# Altium PCB 5111HB015.pcbdoc (part 1 of 2)
Units mm, origin at the board's own origin, x right, y up, seen from the top; angles counter-clockwise.
Board outline 127.27 x 126.7 mm, 2 copper layers (Top Layer, Top, Bottom Layer, Bottom); 107 components, 65 nets, 610 pads, 396 vias.
Unrouted connection lines stored in the file: 97.
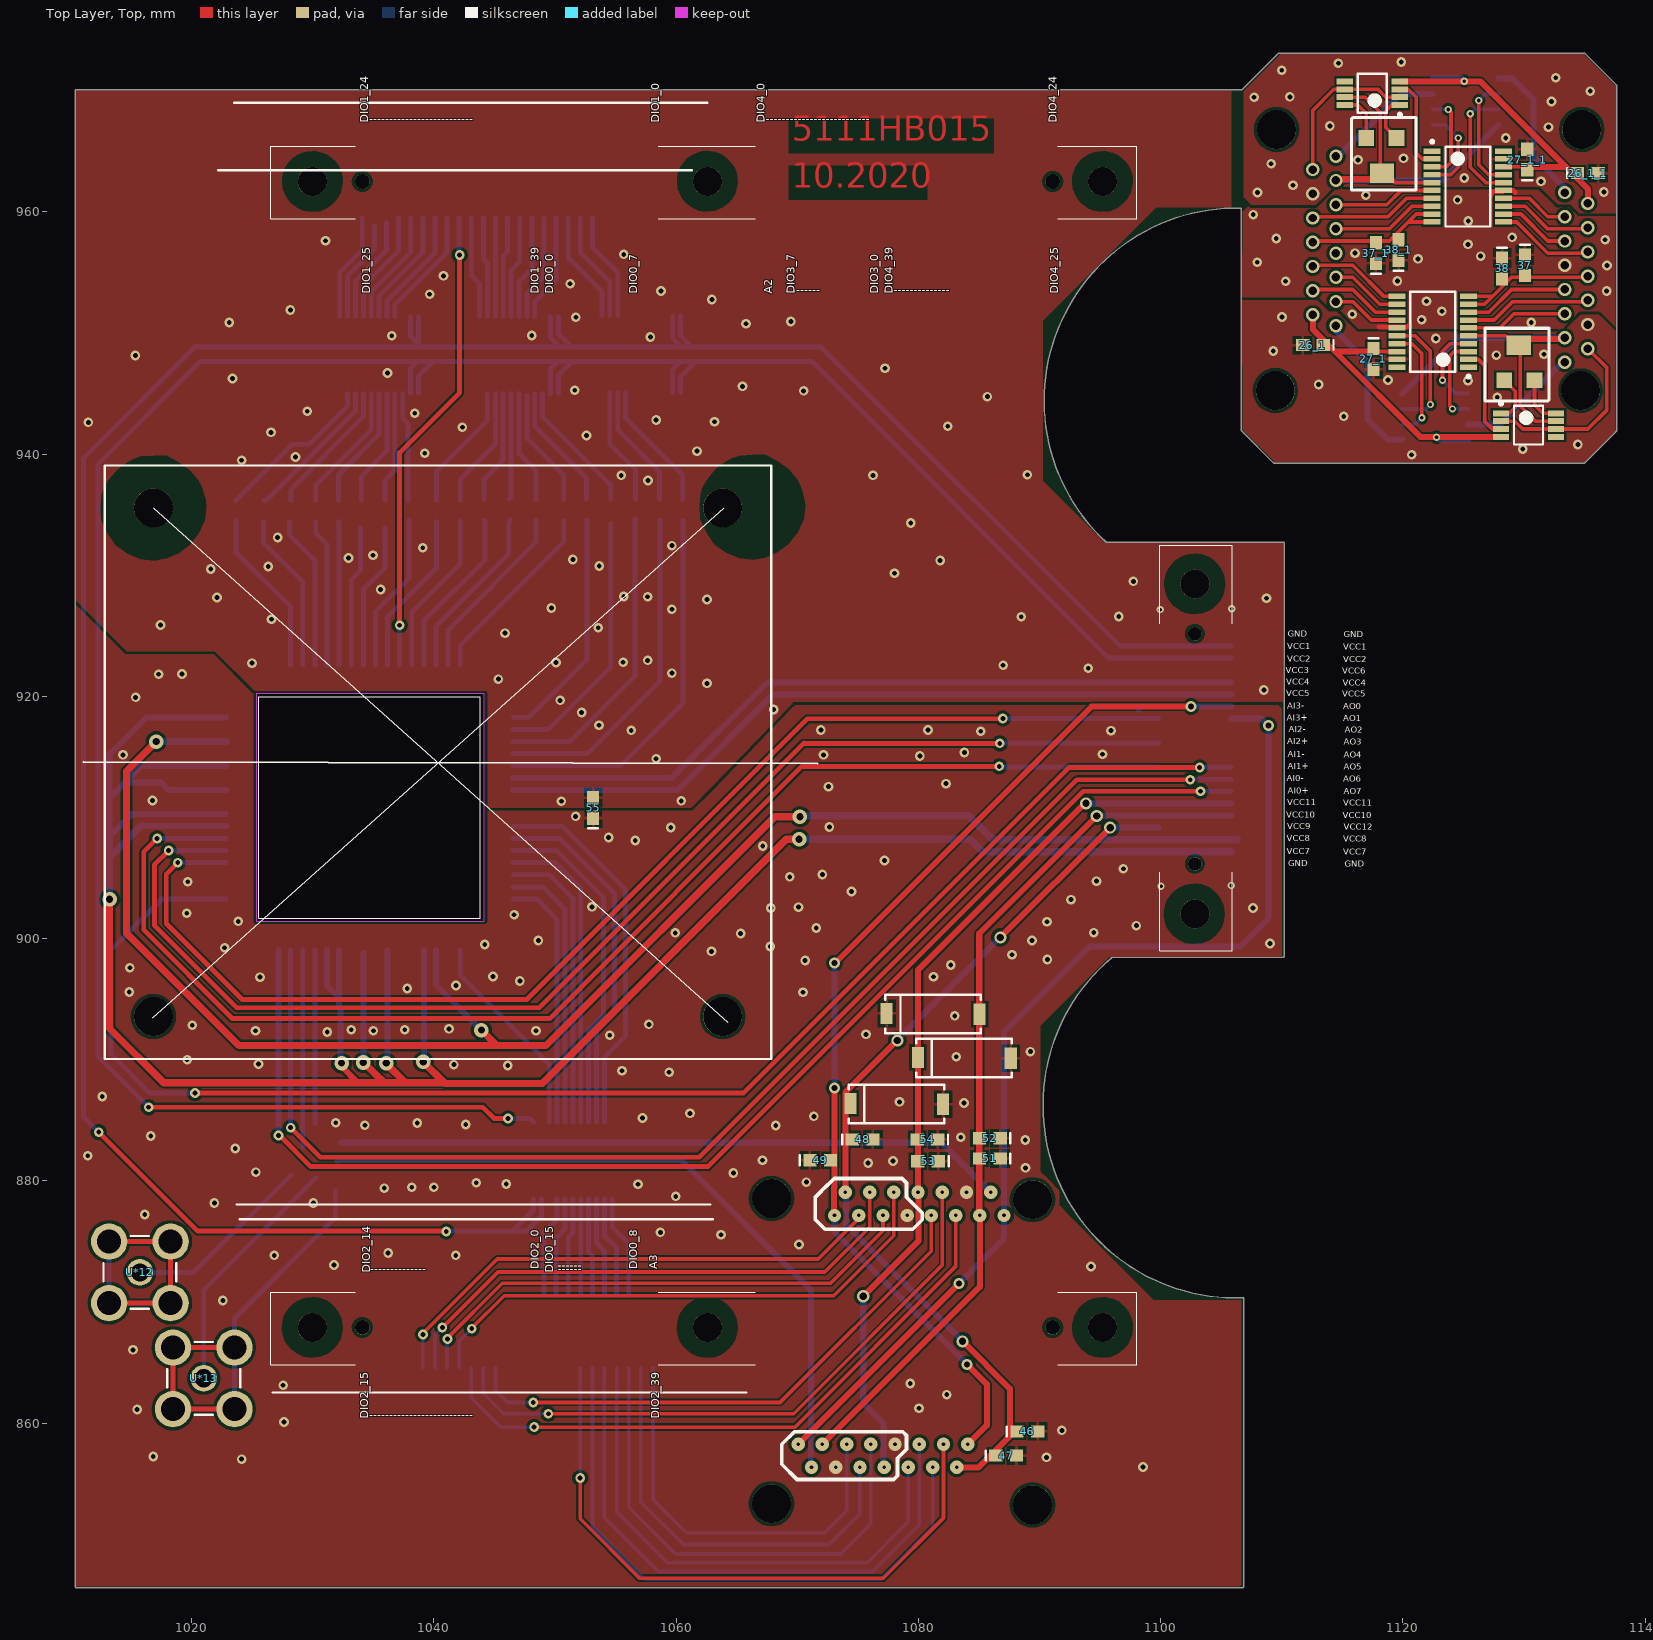
[diagram p0: Top Layer, Top view]
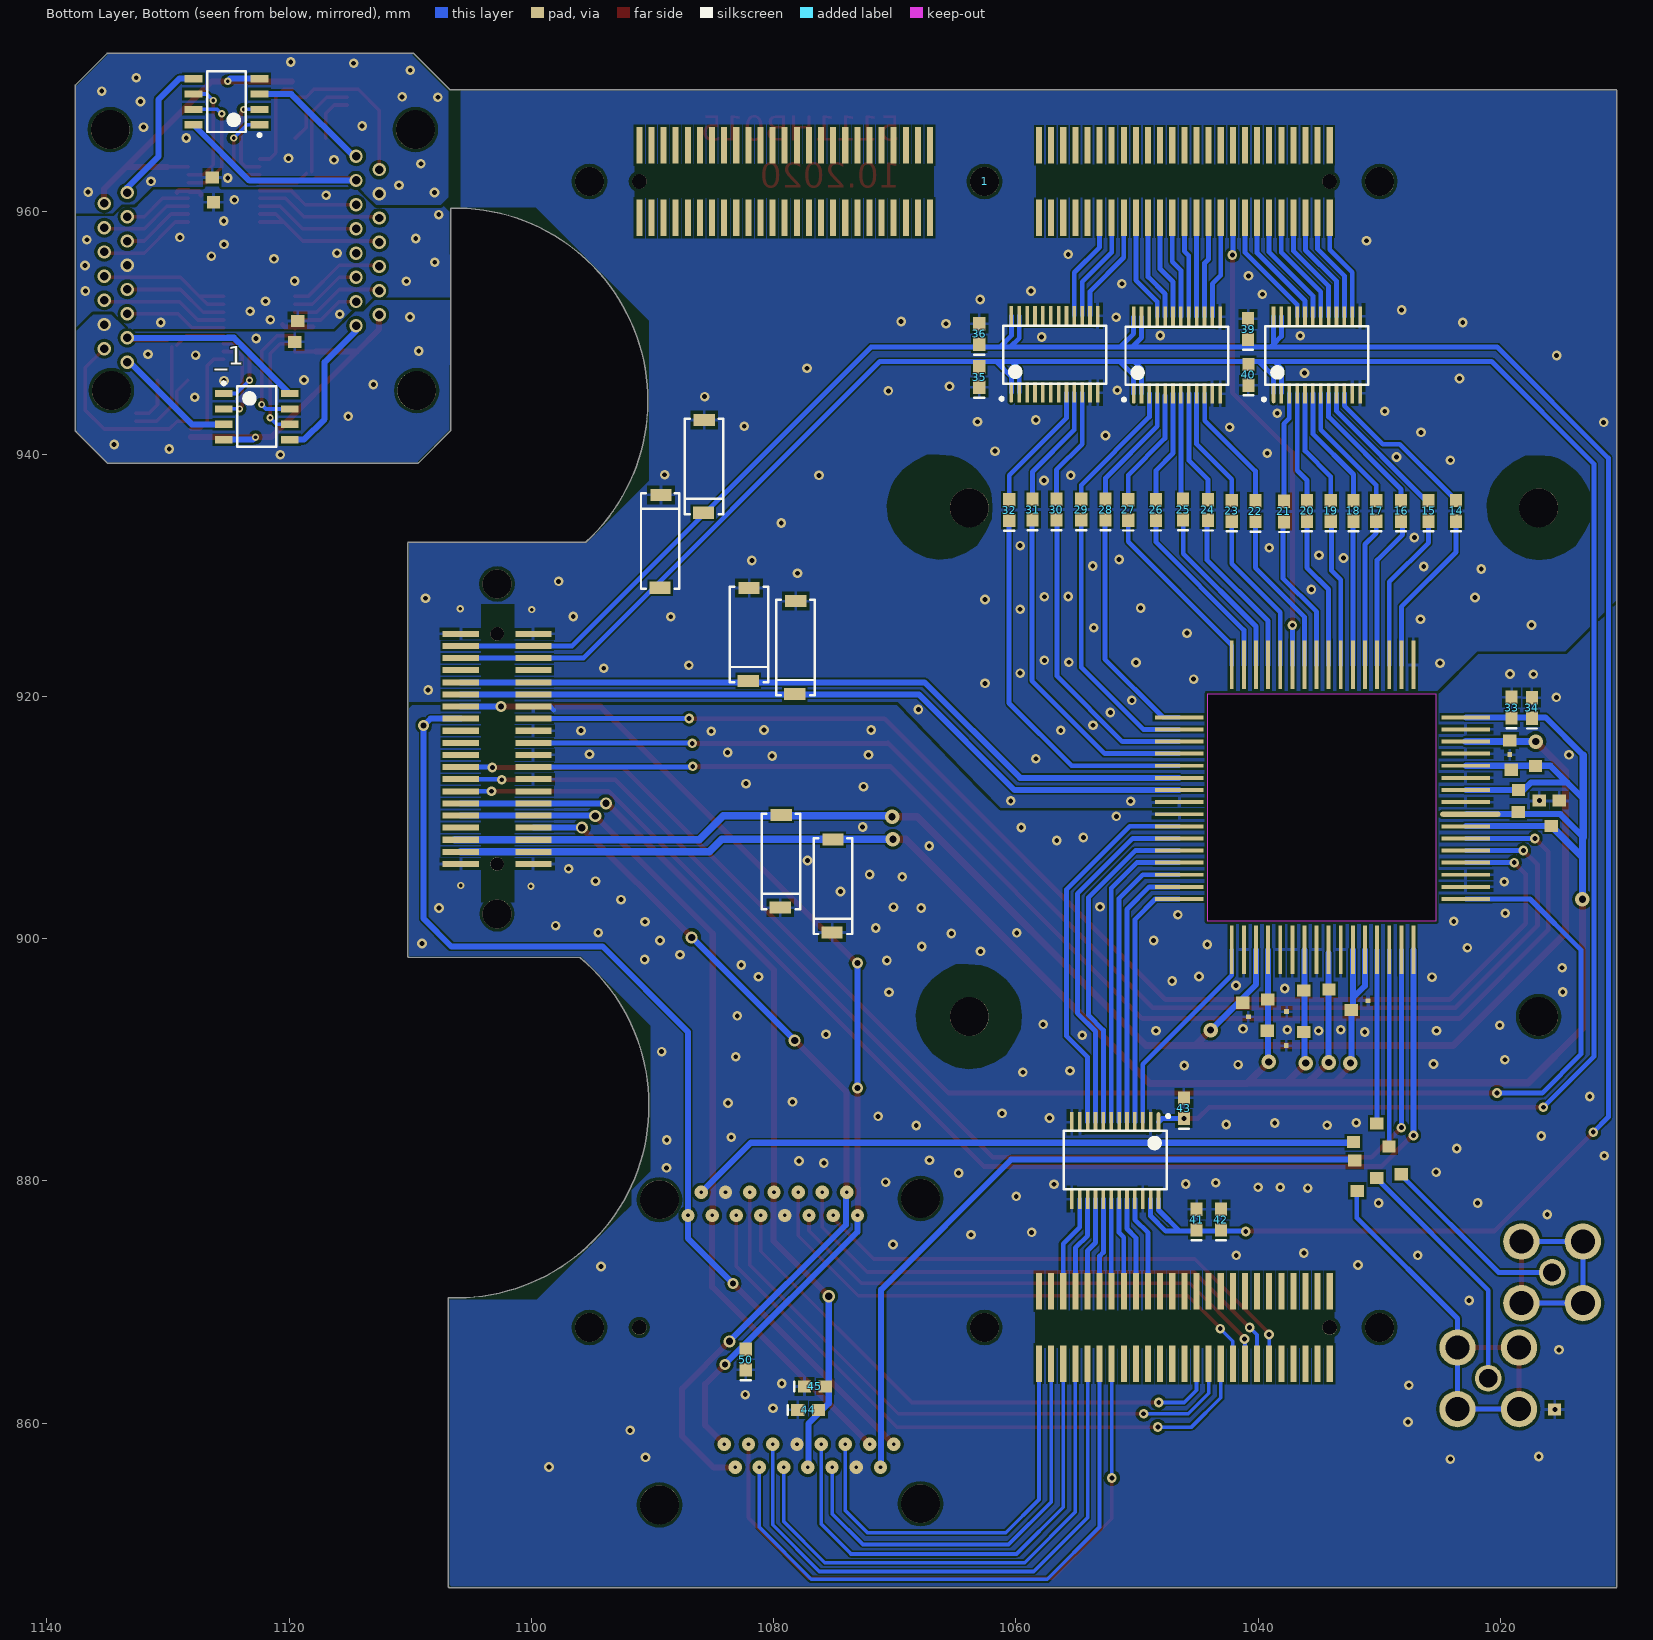
[diagram p1: Bottom Layer, Bottom view, seen from below]

## Layer stack, top to bottom
Top Solder, Top Mask: solder mask 0.0102, Solder Resist, Dk 3.5
Top Layer, Top: signal copper 0.0356
Dielectric 1: dielectric 0.32, FR-4, Dk 4.8
Bottom Layer, Bottom: signal copper 0.0356
Bottom Solder, Bot Mask: solder mask 0.0102, Solder Resist, Dk 3.5

## Board outline
1010.394,846.496 ccw(c1010.494,846.496) 1010.494,846.396 1106.763,846.415 ccw(c1106.763,846.515) 1106.863,846.515 ccw(c1106.763,846.515) 1106.863,846.515 1106.874,870.231 ccw(c1106.777,870.254) 1106.877,870.254 ccw(c1106.777,870.254) 1106.773,870.355 cw(c1106.19,886.244) 1095.97,898.424 ccw(c1095.906,898.5) 1095.986,898.441 1110.1,898.449 ccw(c1110.1,898.549) 1110.2,898.549 1110.2,932.642 ccw(c1110.1,932.642) 1110.1,932.743 1095.574,932.741 ccw(c1095.574,932.641) 1095.518,932.724 cw(c1106.289,944.419) 1106.675,960.314 1106.675,942.025 ccw(c1106.775,942.025) 1106.678,942 ccw(c1106.775,941.975) 1106.704,941.904 1109.329,939.279 ccw(c1109.4,939.35) 1109.4,939.25 1134.95,939.25 ccw(c1134.95,939.35) 1135.021,939.279 1137.58,941.838 ccw(c1137.509,941.909) 1137.6,941.867 ccw(c1137.559,941.959) 1137.659,941.959 1137.659,970.416 ccw(c1137.559,970.416) 1137.63,970.487 1135.046,973.071 ccw(c1134.975,973) 1134.975,973.1 1109.775,973.1 ccw(c1109.775,973) 1109.696,973.062 ccw(c1109.759,972.984) 1109.688,973.055 1106.733,970.1 1010.503,970.1 ccw(c1010.503,970) 1010.497,970.1 1010.498,970.1 ccw(c1010.492,970) 1010.392,970
cut-out: 1025.325,920.225 1025.325,901.45 1044.175,901.45 1044.175,920.225

## Design rules (kind name [scope] priority, off if disabled: settings)
Clearance [All] p1: gap=0.254 except(0.13: Arc-Arc Arc-Track Track-Track; 0.15: Arc-SMDPad Arc-THPad Arc-Via Arc-Fill Arc-Poly Arc-Region Track-SMDPad Track-THPad Track-Via Track-Fill Track-Poly Track-Region SMDPad-SMDPad THPad-THPad THPad-Via; 0.2: SMDPad-Fill SMDPad-Poly SMDPad-Region Via-Via)
PlaneClearance [All] p1: clearance=0.254
PolygonConnect PolygonConnect_4 [All vs IsVia] p1: connectstyle=Direct reliefconductorwidth=0.381 reliefentries=4 polygonreliefangle="90 Angle" airgapwidth=0.254
PolygonConnect PolygonConnect_3 [IsPolygon And InNet('GND') And OnLayer('Bottom Layer, Bottom') vs IsPad] p2: connectstyle=Relief reliefconductorwidth=0.3 reliefentries=4 polygonreliefangle="90 Angle" airgapwidth=0.254
PolygonConnect PolygonConnect_2 [IsPolygon And InNet('GND') And OnLayer('Top Layer, Top') vs IsVia] p3: connectstyle=Relief reliefconductorwidth=0.381 reliefentries=4 polygonreliefangle="90 Angle" airgapwidth=0.254
PolygonConnect PolygonConnect_1 [IsPolygon And InNet('GND') And OnLayer('Top Layer, Top') vs IsPad] p4: connectstyle=Relief reliefconductorwidth=0.3 reliefentries=4 polygonreliefangle="90 Angle" airgapwidth=0.254
PolygonConnect [All] p5: connectstyle=Relief reliefconductorwidth=0.254 reliefentries=4 polygonreliefangle="90 Angle" airgapwidth=0.254
RoutingVias [All] p1: holewidth=0.3 width=0.6 viastyle="Through Hole" minholewidth=0.3 minwidth=0.6 maxholewidth=0.9 maxwidth=1.5
SolderMaskExpansion [All] p1: expansion=0.102
Width [All] p1: maxlimit=0.6 minlimit=0.3 preferedwidth=0.4
29 further rules are at their usual default settings.

## Components (designator, comment, footprint, x,y, rotation, side; value= is the part's Value field where it differs from the comment)
1 "" FSI-150-AD-V1_OTV 1034.027,965.435 r0 top
14 "" CC1608-0603 1023.65,935.325 r90 bottom
15 "" CC1608-0603 1025.925,935.325 r90 bottom
16 "" CC1608-0603 1028.2,935.325 r90 bottom
17 "" CC1608-0603 1030.25,935.325 r90 bottom
18 "" CC1608-0603 1032.125,935.325 r90 bottom
19 "" CC1608-0603 1034,935.325 r90 bottom
20 "" CC1608-0603 1035.95,935.325 r90 bottom
21 "" CC1608-0603 1037.875,935.275 r90 bottom
22 "" CC1608-0603 1040.225,935.3 r90 bottom
23 "" CC1608-0603 1042.175,935.325 r90 bottom
24 "" CC1608-0603 1044.15,935.4 r90 bottom
25 "" CC1608-0603 1046.2,935.425 r90 bottom
26 "" CC1608-0603 1048.425,935.4 r90 bottom
26_1 "" CC1608-0603 1112.575,949 r180 top
26_1_1 "" CC1608-0603 1135.275,963.2 r0 top
27 "" CC1608-0603 1050.725,935.4 r90 bottom
27_1 "" CC1608-0603 1117.575,947.875 r270 top
27_1_1 "" CC1608-0603 1130.275,964.325 r90 top
28 "" CC1608-0603 1052.6,935.425 r90 bottom
29 "" CC1608-0603 1054.6,935.425 r90 bottom
30 "" CC1608-0603 1056.65,935.425 r90 bottom
31 "" CC1608-0603 1058.625,935.425 r90 bottom
32 "" CC1608-0603 1060.55,935.375 r90 bottom
33 "" CC1608-0603 1019.075,919.075 r90 bottom
34 "" CC1608-0603 1017.4,919.05 r90 bottom
35 "" CC1608-0603 1063.025,946.369 r90 bottom
36 "" CC1608-0603 1063.025,949.925 r90 bottom
37 "" CC1608-0603 1130.075,955.6 r270 top
37_1 "" CC1608-0603 1117.775,956.6 r90 top
38 "" CC1608-0603 1128.202,955.34 r270 top
38_1 "" CC1608-0603 1119.648,956.86 r90 top
39 "" CC1608-0603 1040.825,950.325 r90 bottom
40 "" CC1608-0603 1040.8,946.55 r90 bottom
41 "" CC1608-0603 1045.075,876.8 r90 bottom
42 "" CC1608-0603 1043.075,876.8 r90 bottom
43 "" CC1608-0603 1046.125,886 r90 bottom
44 "" CC1608-0603 1077.15,861.1 r180 bottom
45 "" CC1608-0603 1076.6,863.025 r180 bottom
46 "" CC1608-0603 1089,859.325 r0 top
47 "" CC1608-0603 1087.25,857.325 r0 top
48 "" CC1608-0603 1075.4,883.425 r0 top
49 "" CC1608-0603 1071.9,881.7 r0 top
50 "" CC1608-0603 1082.3,865.25 r90 bottom
51 "" CC1608-0603 1085.9,881.85 r180 top
52 "" CC1608-0603 1085.9,883.525 r180 top
53 "" CC1608-0603 1080.8,881.625 r180 top
54 "" CC1608-0603 1080.75,883.425 r180 top
55 "" CC1608-0603 1053.15,910.8 r90 top
_1 "Comment" AD8676ARZ 1122.675,943.1 r180 bottom
U*12 "" 919-109J 1015.725,872.45 r0 top
U*13 "" 919-109J 1021,863.7 r0 top
? "Comment" pad 1125.75,962.25 r90 bottom
? "Comment" pad 1125.65,960.2 r90 bottom
? "Comment" pad 1118.95,948.675 r90 bottom
? "Comment" pad 1118.7,950.4 r90 bottom
? "Comment" PAD_mini 1037.875,891.375 r180 bottom
? "Comment" PAD_mini 1041,893.747 r180 bottom
? "Comment" pad 1035.625,891.7 r90 bottom
? "Comment" pad 1038.65,891.8 r90 bottom
? "Comment" CAP_TANTAL 1080.15,886.425 r270 top
? "Comment" CAP_TANTAL 1083.15,893.854 r270 top
? "Comment" CAP_TANTAL 1085.725,890.225 r270 top
? "Comment" CAP_TANTAL 1079.475,908.325 r180 bottom
? "Comment" CAP_TANTAL 1075.2,906.275 r180 bottom
? "Comment" CAP_TANTAL 1078.275,925.975 r180 bottom
? "Comment" CAP_TANTAL 1082.125,927.05 r180 bottom
? "Comment" CAP_TANTAL 1085.823,940.925 r180 bottom
? "Comment" CAP_TANTAL 1089.275,930.875 r0 bottom
? "" FSI-120-AD-V2_OTV 1100.371,906.327 r90 top
? "Comment" 7841R_pad 1029.967,867.898 r0 top
? "Comment" pad 1040.673,894.104 r90 bottom
? "Comment" PAD_mini 1019.425,915.4 r180 bottom
? "Comment" pad 1018.625,915.757 r90 bottom
? "Comment" pad 1016.5,913.65 r90 bottom
? "Comment" pad 1018.5,913.343 r90 bottom
? "Comment" PAD_mini 1037.85,894.175 r180 bottom
? "Comment" PAD_mini 1031.125,895.075 r180 bottom
? "Comment" pad 1031.7,893.5 r90 bottom
? "Comment" pad 1038.6,894.375 r90 bottom
? "Comment" pad 1035.625,895.125 r90 bottom
? "Comment" pad 1033.55,895.2 r90 bottom
? "Comment" pad 1015.2,908.7 r90 bottom
? "Comment" pad 1014.55,910.8 r90 bottom
? "Comment" pad 1017.925,909.85 r90 bottom
? "Comment" pad 1016.175,910.8 r90 bottom
? "Comment" pad 1017.9,911.675 r90 bottom
? "Comment" SN74LVC4245A_SSOP_24 1051.8,881.725 r270 bottom
? "Comment" SN74LVC4245A_SSOP_24 1056.8,948.2 r90 bottom
? "Comment" SN74LVC4245A_SSOP_24 1035.15,948.15 r90 bottom
? "Comment" 5029HB015 1026.375,910.775 r0 top
? "Comment" SN74LVC4245A_SSOP_24 1046.7,948.125 r90 bottom
? "Comment" "3224W-1-104E, 100 кОм" 1130.675,949.9 r270 top
? "Comment" AD8675ARMZ 1130.375,942.4 r0 top
? "Comment" AD5781 1122.475,950.1 r180 top
? "Comment" AD8676ARZ 1125.175,969.1 r0 bottom
? "Comment" AD5781 1125.375,962.1 r0 top
? "Comment" AD8675ARMZ 1117.475,969.8 r180 top
? "Comment" "3224W-1-104E, 100 кОм" 1117.175,962.3 r90 top
? "Comment" pad 1031.525,882.6 r90 bottom
? "Comment" pad 1031.425,881.075 r90 bottom
? "Comment" pad 1028.6,882.225 r90 bottom
? "Comment" pad 1029.6,884.15 r90 bottom
? "Comment" pad 1027.575,879.95 r90 bottom
? "Comment" pad 1029.6,879.625 r90 bottom
? "Comment" pad 1031.225,878.575 r90 bottom
? "Comment" pad 1014.925,860.525 r90 bottom

## Footprints (in the part's own frame and the unit in brackets; to place one, negate y for a bottom-side part, rotate by r counter-clockwise, add the part's x,y. Pads: shape width x height; smd on the part's side, far side on the other; paste and mask are expansions set on the pad)
919-109J [mm]
  round 2.2 hole 1.5: 1(0,0)
  round 3 hole 2: 2(-2.54,-2.54) 3(2.54,-2.54) 4(2.54,2.54) 5(-2.54,2.54)
  silkscreen extent -3,-3 3,3
"3224W-1-104E, 100 кОм" [mm] "подстроечный резистор"
  rect 1.6x2 smd: 1(0.9,-1.1)
  rect 1.3x1.3 smd: 2(3.8,0.2) 3(3.8,-2.3)
  silkscreen extent -0.5,-3.9 5.5,1.4
5029HB015 [mm] "H18.64-2B"
  oval 5x0.42 smd far side: 1(-3.9,-0.5)
  rect 4x0.32 smd far side: 2(-3.525,-1.5) 3(-3.525,-2.5) 4(-3.525,-3.5) 5(-3.525,-4.5) 6(-3.525,-5.5) 7(-3.525,-6.5) 8(-3.525,-7.5) 25(20.15,-7.5) 26(20.15,-6.5) 27(20.15,-5.5) 28(20.15,-4.5) 29(20.15,-3.5) 30(20.15,-2.5) 31(20.15,-1.5) 32(20.15,-0.5) 33(20.15,0.5) 34(20.15,1.5) 35(20.15,2.5) 36(20.15,3.5) 37(20.15,4.5) 38(20.15,5.5) 39(20.15,6.5) 40(20.15,7.5) 57(-3.525,7.5) 58(-3.525,6.5) 59(-3.525,5.5) 60(-3.525,4.5) 61(-3.525,3.5) 62(-3.525,2.5) 63(-3.525,1.5) 64(-3.525,0.5)
  rect 0.32x4 smd far side: 9(0.8,-11.7) 10(1.8,-11.7) 11(2.8,-11.7) 12(3.8,-11.7) 13(4.8,-11.7) 14(5.8,-11.7) 15(6.8,-11.7) 16(7.8,-11.7) 17(8.8,-11.7) 18(9.8,-11.7) 19(10.8,-11.7) 20(11.8,-11.7) 21(12.8,-11.7) 22(13.8,-11.7) 23(14.8,-11.7) 24(15.8,-11.7) 41(15.8,11.825) 42(14.8,11.825) 43(13.8,11.825) 44(12.8,11.825) 45(11.8,11.825) 46(10.8,11.825) 47(9.8,11.825) 48(8.8,11.825) 49(7.8,11.825) 50(6.8,11.825) 51(5.8,11.825) 52(4.8,11.825) 53(3.8,11.825) 54(2.8,11.825) 55(1.8,11.825) 56(0.8,11.825)
  silkscreen extent -0.85,-9.1 17.45,9.2
7841R_pad [mm]
  rect 0.5x3 smd far side: 1(4.12,3) 2(5.12,3) 3(6.12,3) 4(7.12,3) 5(8.12,3) 6(9.12,3) 7(10.12,3) 8(11.12,3) 9(12.12,3) 10(13.12,3) 11(14.12,3) 12(15.12,3) 13(16.12,3) 14(17.12,3) 15(18.12,3) 16(19.12,3) 17(20.12,3) 18(21.12,3) 19(22.12,3) 20(23.12,3) 21(24.12,3) 22(25.12,3) 23(26.12,3) 24(27.12,3) 25(28.12,3) 76(28.12,-3) 77(27.12,-3) 78(26.12,-3) 79(25.12,-3) 80(24.12,-3) 81(23.12,-3) 82(22.12,-3) 83(21.12,-3) 84(20.12,-3) 85(19.12,-3) 86(18.12,-3) 87(17.12,-3) 88(16.12,-3) 89(15.12,-3) 90(14.12,-3) 91(13.12,-3) 92(12.12,-3) 93(11.12,-3) 94(10.12,-3) 95(9.12,-3) 96(8.12,-3) 97(7.12,-3) 98(6.12,-3) 99(5.12,-3) 100(4.12,-3)
  round 2.4 hole 2.4 unplated: 101(0,0) 102(32.62,0) 103(65.24,0)
  round 1.2 hole 1.2 unplated: 104(4.12,0) 105(61.12,0)
  Top Layer, Top pour cut-out: 30.853,-1.818 31.315,-2.151 31.473,-2.242 31.907,-2.428 32.466,-2.516 33.246,-2.446 33.881,-2.168 34.378,-1.769 34.67,-1.426 34.902,-1.027 35.046,-0.553 35.111,-0.085 35.092,0.352 34.99,0.783 34.809,1.201 34.517,1.628 34.164,1.957 33.97,2.101 33.756,2.231 33.436,2.356 33.209,2.426 32.907,2.491 32.578,2.504 32.132,2.463 31.77,2.365 31.399,2.198 30.977,1.924 30.657,1.581 30.383,1.164 30.262,0.88 30.169,0.574 30.109,0.226 30.104,-0.089 30.165,-0.618 30.35,-1.119 30.592,-1.495
  Top Layer, Top pour cut-out: -1.761,-1.807 -1.299,-2.14 -1.141,-2.231 -0.707,-2.417 -0.148,-2.505 0.632,-2.435 1.267,-2.157 1.764,-1.758 2.056,-1.415 2.288,-1.016 2.432,-0.542 2.497,-0.074 2.478,0.363 2.376,0.794 2.195,1.212 1.903,1.639 1.55,1.968 1.356,2.112 1.142,2.242 0.822,2.367 0.595,2.437 0.293,2.502 -0.036,2.515 -0.482,2.474 -0.844,2.376 -1.215,2.209 -1.637,1.935 -1.957,1.592 -2.231,1.175 -2.352,0.891 -2.445,0.585 -2.505,0.237 -2.51,-0.078 -2.449,-0.607 -2.264,-1.108 -2.022,-1.484
  Top Layer, Top pour cut-out: 63.486,-1.811 63.948,-2.144 64.106,-2.235 64.54,-2.421 65.099,-2.509 65.879,-2.439 66.514,-2.161 67.011,-1.762 67.303,-1.419 67.535,-1.02 67.679,-0.546 67.744,-0.078 67.725,0.359 67.623,0.79 67.442,1.208 67.15,1.635 66.797,1.964 66.603,2.108 66.389,2.238 66.069,2.363 65.842,2.433 65.54,2.498 65.211,2.511 64.765,2.47 64.403,2.372 64.032,2.205 63.61,1.931 63.29,1.588 63.016,1.171 62.895,0.887 62.802,0.581 62.742,0.233 62.737,-0.082 62.798,-0.611 62.983,-1.112 63.225,-1.488
  Bottom Layer, Bottom pour cut-out: 3.742,-1.368 28.435,-1.377 28.435,1.426 3.746,1.426
  silkscreen extent -3.44,-5.37 68.06,2.92
AD5781 [mm] "tssop,20"
  rect 1.4x0.45 smd: 1(-2.95,2.925) 2(-2.95,2.275) 3(-2.95,1.625) 4(-2.95,0.975) 5(-2.95,0.325) 6(-2.95,-0.325) 7(-2.95,-0.975) 8(-2.95,-1.625) 9(-2.95,-2.275) 10(-2.95,-2.925) 11(2.95,-2.925) 12(2.95,-2.275) 13(2.95,-1.625) 14(2.95,-0.975) 15(2.95,-0.325) 16(2.95,0.325) 17(2.95,0.975) 18(2.95,1.625) 19(2.95,2.275) 20(2.95,2.925)
  silkscreen extent -3.08,-3.3 1.85,3.82, body extent -2.25,-3.3 2.25,3.3, height 1.2
AD8675ARMZ [mm] "MSOP-8"
  rect 1.35x0.5 smd: 1(-2.275,0.975) 2(-2.275,0.325) 3(-2.275,-0.325) 4(-2.275,-0.975) 5(2.275,-0.975) 6(2.275,-0.325) 7(2.275,0.325) 8(2.275,0.975)
  silkscreen extent -2.4,-1.6 1.2,1.9, body extent -1.6,-1.6 1.6,1.6, height 1.2
AD8676ARZ [mm] "SOIC-8"
  rect 1.45x0.6 smd: 1(-2.725,1.905) 2(-2.725,0.635) 3(-2.725,-0.635) 4(-2.725,-1.905) 5(2.725,-1.905) 6(2.725,-0.635) 7(2.725,0.635) 8(2.725,1.905)
  silkscreen extent -2.85,-2.5 1.6,2.88, body extent -2,-2.5 2,2.5, height 1.75
CAP_TANTAL [mm]
  rect 1.75x1 smd: 1(0.1,1.9) 2(0.025,-5.765)
  silkscreen extent -1.5,-5.89 1.68,2
CC1608-0603 [mm]
  rect 1.1x1 smd: 1(-0.85,0) 2(0.85,0)
  silkscreen extent -1.7,-0.4 -1.7,0.4
FSI-120-AD-V2_OTV [mm]
  rect 0.5x3 smd far side: 1(-0.16,0.54) 2(0.84,0.54) 3(1.84,0.54) 4(2.84,0.54) 5(3.84,0.54) 6(4.84,0.54) 7(5.84,0.54) 8(6.84,0.54) 9(7.84,0.54) 10(8.84,0.54) 11(9.84,0.54) 12(10.84,0.54) 13(11.84,0.54) 14(12.84,0.54) 15(13.84,0.54) 16(14.84,0.54) 17(15.84,0.54) 18(16.84,0.54) 19(17.84,0.54) 20(18.84,0.54) 21(18.84,-5.46) 22(17.84,-5.46) 23(16.84,-5.46) 24(15.84,-5.46) 25(14.84,-5.46) 26(13.84,-5.46) 27(12.84,-5.46) 28(11.84,-5.46) 29(10.84,-5.46) 30(9.84,-5.46) 31(8.84,-5.46) 32(7.84,-5.46) 33(6.84,-5.46) 34(5.84,-5.46) 35(4.84,-5.46) 36(3.84,-5.46) 37(2.84,-5.46) 38(1.84,-5.46) 39(0.84,-5.46) 40(-0.16,-5.46)
  round 1.1 hole 1.1 unplated: 41(-0.16,-2.46) 42(18.84,-2.46)
  round 2.4 hole 2.4 unplated: 43(-4.28,-2.46) 44(22.96,-2.46)
  silkscreen extent -7.34,-5.54 26.16,0.46
FSI-150-AD-V1_OTV [mm]
  rect 0.5x3 smd far side: 1(0.06,0.08) 2(1.06,0.08) 3(2.06,0.08) 4(3.06,0.08) 5(4.06,0.08) 6(5.06,0.08) 7(6.06,0.08) 8(7.06,0.08) 9(8.06,0.08) 10(9.06,0.08) 11(10.06,0.08) 12(11.06,0.08) 13(12.06,0.08) 14(13.06,0.08) 15(14.06,0.08) 16(15.06,0.08) 17(16.06,0.08) 18(17.06,0.08) 19(18.06,0.08) 20(19.06,0.08) 21(20.06,0.08) 22(21.06,0.08) 23(22.06,0.08) 24(23.06,0.08) 25(24.06,0.08) 26(33.06,0.08) 27(34.06,0.08) 28(35.06,0.08) 29(36.06,0.08) 30(37.06,0.08) 31(38.06,0.08) 32(39.06,0.08) 33(40.06,0.08) 34(41.06,0.08) 35(42.06,0.08) 36(43.06,0.08) 37(44.06,0.08) 38(45.06,0.08) 39(46.06,0.08) 40(47.06,0.08) 41(48.06,0.08) 42(49.06,0.08) 43(50.06,0.08) 44(51.06,0.08) 45(52.06,0.08) 46(53.06,0.08) 47(54.06,0.08) 48(55.06,0.08) 49(56.06,0.08) 50(57.06,0.08) 51(57.06,-5.92) 52(56.06,-5.92) 53(55.06,-5.92) 54(54.06,-5.92) 55(53.06,-5.92) 56(52.06,-5.92) 57(51.06,-5.92) 58(50.06,-5.92) 59(49.06,-5.92) 60(48.06,-5.92) 61(47.06,-5.92) 62(46.06,-5.92) 63(45.06,-5.92) 64(44.06,-5.92) 65(43.06,-5.92) 66(42.06,-5.92) 67(41.06,-5.92) 68(40.06,-5.92) 69(39.06,-5.92) 70(38.06,-5.92) 71(37.06,-5.92) 72(36.06,-5.92) 73(35.06,-5.92) 74(34.06,-5.92) 75(33.06,-5.92) 76(24.06,-5.92) 77(23.06,-5.92) 78(22.06,-5.92) 79(21.06,-5.92) 80(20.06,-5.92) 81(19.06,-5.92) 82(18.06,-5.92) 83(17.06,-5.92) 84(16.06,-5.92) 85(15.06,-5.92) 86(14.06,-5.92) 87(13.06,-5.92) 88(12.06,-5.92) 89(11.06,-5.92) 90(10.06,-5.92) 91(9.06,-5.92) 92(8.06,-5.92) 93(7.06,-5.92) 94(6.06,-5.92) 95(5.06,-5.92) 96(4.06,-5.92) 97(3.06,-5.92) 98(2.06,-5.92) 99(1.06,-5.92) 100(0.06,-5.92)
  round 2.4 hole 2.4 unplated: 101(-4.06,-2.92) 102(28.56,-2.92) 103(61.18,-2.92)
  round 1.2 hole 1.2 unplated: 104(0.06,-2.92) 105(57.06,-2.92)
  silkscreen extent -7.5,-6 64,0
pad [mm]
  rect 1x1.1 smd: 1(0.6,0.6)
PAD_mini [mm]
  rect 0.4x0.4 smd: 1(0.2,-0.2)
SN74LVC4245A_SSOP_24 [mm]
  oval 1.65x0.3 smd: 1(-3.125,3.575)
  rect 1.65x0.3 smd: 2(-3.125,2.925) 3(-3.125,2.275) 4(-3.125,1.625) 5(-3.125,0.975) 6(-3.125,0.325) 7(-3.125,-0.325) 8(-3.125,-0.975) 9(-3.125,-1.625) 10(-3.125,-2.275) 11(-3.125,-2.925) 12(-3.125,-3.575) 13(3.225,-3.575) 14(3.225,-2.925) 15(3.225,-2.275) 16(3.225,-1.625) 17(3.225,-0.975) 18(3.225,-0.325) 19(3.225,0.325) 20(3.225,0.975) 21(3.225,1.625) 22(3.225,2.275) 23(3.225,2.925) 24(3.225,3.575)
  silkscreen extent -3.75,-4.25 2.4,4.5, body extent -3.28,-3.95 3.28,3.95, height 1.2

## Free pads (board coordinates)
  round 3.2 hole 3.2 unplated: 0(1016.842,893.566) 0(1016.842,935.566) 0(1063.842,893.566) 0(1063.842,935.566) 0(1067.875,853.35) 0(1067.875,878.55) 0(1089.425,853.25) 0(1089.425,878.45) 0(1109.475,945.25) 0(1109.575,966.8) 0(1134.675,945.25) 0(1134.775,966.8)

## Via types
v1: diameter 0.8, hole 0.4, Top Layer, Top to Bottom Layer, Bottom, tented both sides, 300 vias
v2: diameter 1.1, hole 0.3, Top Layer, Top to Bottom Layer, Bottom, 30 vias
v3: diameter 1.1, hole 0.7, Top Layer, Top to Bottom Layer, Bottom, 30 vias
v4: diameter 0.6, hole 0.3, Top Layer, Top to Bottom Layer, Bottom, tented both sides, 14 vias
v5: diameter 1.2, hole 0.6, Top Layer, Top to Bottom Layer, Bottom, tented both sides, 9 vias
v6: diameter 1, hole 0.6, Top Layer, Top to Bottom Layer, Bottom, tented both sides, 7 vias
v7: diameter 0.9, hole 0.5, Top Layer, Top to Bottom Layer, Bottom, tented both sides, 6 vias

## Nets (pads, with @x,y where several pads share a name; then routed paths per layer and width w, separated by ;. In a path a pad name is that pad's centre, name@x,y a point inside that pad or via, vN(x,y) a via of type N, cw(c..) or ccw(c..) an arc to the next point about the centre after c; other vN are vias at no path point)
AD8675_NULL: ?.1@1119.75,968.825 ?.1@1128.1,943.375 ?.2@1116.975,966.1 ?.2@1130.875,946.1 ?.3@1119.475,966.1 ?.3@1128.375,946.1 ?.8@1115.2,968.825 ?.8@1132.65,943.375 | length 14.8
  Top Layer, Top w0.3: ?.8@1115.2,968.825 1116.275,968.825 1116.975,968.125 ?.2@1116.975,966.1 ; ?.1@1119.075,968.825 1118.575,968.325 1118.575,967 ?.3@1119.475,966.1 ; ?.3@1128.375,946.1 1129.275,945.2 1129.275,943.875 1128.775,943.375 ; ?.2@1130.875,946.1 1130.875,944.075 1131.575,943.375 ?.8@1132.65,943.375
AD8675_VOUT: ?.1@1032.025,881.675 ?.1@1032.125,883.2 ?.2@1119.75,969.475 ?.2@1128.1,942.725 ?.6@1115.2,970.125 ?.6@1132.65,942.075 | length 142
  Top Layer, Top w0.3: v3(1112.575,963.5) 1112.575,968.4 1114.3,970.125 ?.6@1115.2,970.125 1117.95,970.125 1118.6,969.475 ?.2@1119.75,969.475 ; ?.2@1128.1,942.725 1129.25,942.725 1129.9,942.075 ?.6@1132.65,942.075 1135.275,942.075 1136.85,943.65 1136.85,947.125 v3(1135.275,948.7)
  Bottom Layer, Bottom w0.5: ?.1@1032.025,881.675 1032.1,881.75 1060.4,881.75 1071.125,871.025 1071.125,856.4 v2(1071.175,856.35) ; ?.1@1032.35,883.15 1081.875,883.15 v2(1085.975,879.05)
AGND: 33.2 34.2 41.2 42.2 43.2 44.1 45.1 46.2 47.2 48.2 49.1 50.1 51.1 52.1 53.1 54.1 55.1 ?.1@1015.15,911.4 ?.1@1015.525,861.125 ?.1@1016.775,911.4 ?.1@1019.225,915.2 ?.1@1030.925,894.875 ?.1@1037.65,893.975 ?.1@1037.675,891.175 ?.1@1040.8,893.547 ?.1@1082.05,886.325 ?.1@1087.625,890.125 ?.1@1099.831,906.167 ?.2@1048.875,884.85 ?.2@1075.175,900.51 ?.2@1077.385,893.829 ?.2@1079.45,902.56 ?.6@1022.85,905.275 ?.7@1022.85,904.275 ?.8@1099.831,913.167 ?.10@1099.831,915.167 ?.11@1054.725,884.85 ?.12@1055.375,884.85 ?.12@1099.831,917.167 ?.13@1055.375,878.5 ?.14@1099.831,919.167 ?.15@1033.175,899.075 ?.17@1035.175,899.075 ?.19@1037.175,899.075 ?.20@1038.175,899.075 ?.22@1037.425,951.375 ?.22@1048.975,951.35 ?.22@1049.525,878.5 ?.22@1059.075,951.425 ?.23@1041.175,899.075 ?.32@1046.525,910.275 ?.40@1105.831,906.167 ?.58 ?.60 ?.62 ?.64 | length 1.8
  Bottom Layer, Bottom w0.4: 1098.15,918.875 1098.442,919.167 ?.14@1099.831,919.167
  other v1: 1098.55,856.375 1024.125,857.025 1090.575,857.175 1016.825,857.25 1091.85,859.4 1027.625,860.1 1015.5,861.125 1080.05,861.225 1082.35,862.35 1027.55,863.125 1079.325,863.275 1015.15,866.05 1022.575,870.125 1094.25,872.925 1031.75,873.05 1026.825,873.85 1041.8,873.85 1036.225,874.05 1070.15,874.75 1063.7,875.55 1058.7,875.75 1016.125,877.225 1021.875,878.175 1030.05,878.175 1059.975,878.725 1035.9,879.4 1038.175,879.475 1040,879.475 1056.85,879.725 1045.975,879.75 1043.5,879.85 1070.75,879.9 1064.725,880.65 1025.3,880.725 1088.85,881.075 1075.85,881.475 1077.9,881.65 1067.125,881.7 1011.425,882.075 1023.6,882.675 1088.825,883.375 1083.5,883.6 1016.625,883.7 1068.225,884.575 1034.3,884.6 1042.625,884.65 1038.625,884.775 1031.9,884.8 1057.225,885.2 1071.375,885.325 1061.15,885.575 1083.775,886.425 1078.45,886.525 1012.625,886.975 1059.425,888.975 1055.525,889.1 1046.1,889.525 1041.65,889.6 1025.525,889.65 1019.625,890 1083.125,890.25 1089.25,890.675 1054.525,892.025 1075.675,892.1 1031.2,892.3 1025.275,892.4 1035,892.4 1048.425,892.4 1033.175,892.475 1037.6,892.475 1041.252,892.552 1020.05,892.85 1057.75,892.925 1083,893.625 1070.475,895.575 1014.85,895.6 1037.802,895.879 1041.825,896.125 1047.1,896.5 1025.65,896.825 1081.25,896.85 1044.875,896.875 1014.9,897.6 1082.675,897.825 1070.65,898.2 1090.65,898.275 1087.725,898.675 1062.925,898.95 1022.725,899.25 1067.775,899.35 1044.2,899.525 1109.025,899.6 1048.625,899.85 1089.375,899.85 1065.325,900.425 1059.925,900.475 1094.475,900.5 1071.575,900.875 1098,901.075 1090.625,901.4 1023.85,901.425 1046.625,901.975 1019.6,902.1 1067.825,902.525 1107.625,902.525 1070.1,902.6 1053.05,902.625 1092.6,903.225 1074.475,903.9 1019.675,904.7 1094.7,904.75 1069.375,905.1 1072.075,905.3 1096.925,905.775 1077.2,906.45 1067.15,907.65 1056.625,908.1 1054.425,908.35 1059.55,909.175 1072.65,909.225 1051.7,910.1 1016.775,911.4 1072.575,912.55 1082.275,912.8 1080.125,915.075 1014.325,915.175 1072.175,915.175 1095.2,915.225 1083.8,915.375 1085.15,917.125 1095.9,917.175 1071.95,917.225 1080.8,917.225 1015.375,919.925 1017.275,921.825 1019.2,921.85
  other v2: 1073.175,856.35 1078.075,858.25 1079.075,877.15 1083.975,879.05
  other v4: 1100.041,904.329 1105.835,904.391
AVCC_2.5: 33.1 34.1 ?.1@1015.8,909.3 ?.1@1017.1,914.25 ?.1@1018.5,912.275 ?.1@1018.525,910.45 ?.1@1019.1,913.943 ?.1@1022.475,910.275 ?.1@1032.3,894.1 ?.1@1034.15,895.8 ?.1@1036.225,892.3 ?.1@1036.225,895.725 ?.1@1039.2,894.975 ?.1@1039.25,892.4 ?.1@1075.1,908.175 ?.2@1022.85,909.275 ?.2@1099.831,907.167 ?.13@1031.175,899.075 ?.14@1032.175,899.075 ?.16@1034.175,899.075 ?.18@1036.175,899.075 ?.21@1039.175,899.075 ?.39@1105.831,907.167 ?.57 ?.61 ?.63 | length 227.6
  Top Layer, Top w0.5: v5(1032.375,889.725) 1032.375,889.45 1033.725,888.1
  Top Layer, Top w0.6: v5(1013.225,903.25) 1013.225,892.575 1017.7,888.1 1033.725,888.1 1035.923,888.1 ; v5(1034.175,889.775) 1035.923,888.1 ; v5(1036.075,889.725) 1036.075,889.675 1037.65,888.1 ; v5(1039.125,889.825) 1040.85,888.1 1037.65,888.1 ; 1040.9,888.05 1048.939,888.05 1069.089,908.2 v5(1070.15,908.2) ; 1035.923,888.1 1037.65,888.1
  Bottom Layer, Bottom w0.5: 1013.15,908.375 1015.05,910.275 ?.1@1022.475,910.275 ?.1@1022.8,910.275 ; 1013.15,915.15 1016.275,918.275 ?.57@1022.85,918.275 ; 1013.225,911.625 1014.475,912.875 ; ?.1@1015.975,909.3 ?.2@1022.825,909.3 ; ?.63@1022.85,912.275 ?.1@1018.5,912.275 1018.075,912.275 1017.475,912.875 1014.475,912.875 ; ?.61@1022.85,914.275 1015.875,914.275 1014.475,912.875 ; ?.13@1031.175,899.075 1031.175,896.1 1032.175,895.1 ; ?.1@1032.175,894.425 1032.175,895.1 ; ?.14@1032.175,899.075 1032.175,895.1 ; ?.1@1032.3,894.1 1032.3,889.775 1032.35,889.725 v5(1032.375,889.725) ; v5(1034.175,889.775) ?.16@1034.175,898.8 ; v5(1036.075,889.725) 1036.175,889.825 ?.18@1036.175,899.075 ; v5@1039.175,889.9 ?.21@1039.175,899.075
  Bottom Layer, Bottom w0.6: 1013.15,915.15 1013.15,908.375 1013.212,908.313 1013.212,903.262 v5(1013.225,903.25) ; 1013.225,906.725 ?.1@1015.8,909.3 ?.1@1015.975,909.3 ; v5(1070.15,908.2) 1084.275,908.2 1085.308,907.167 ?.2@1099.831,907.167 ?.39@1105.831,907.167
AVDD_1.2: ?.1@1019.225,916.357 ?.1@1041.273,894.704 ?.1@1079.375,910.225 ?.3@1099.831,908.167 ?.22@1040.175,899.075 ?.38@1105.831,908.167 ?.59 | length 136.8
  Top Layer, Top w0.6: v5(1017.075,916.275) 1014.625,913.825 1014.625,900.45 1023.9,891.175 1045.2,891.175 ; v5(1043.925,892.45) 1045.2,891.175 ; v5(1070.225,910.075) 1068.15,910.075 1049.25,891.175 1045.2,891.175
  Bottom Layer, Bottom w0.5: ?.22@1040.175,899.075 1040.175,896.2 v5(1043.925,892.45)
  Bottom Layer, Bottom w0.6: v5(1017.075,916.275) ?.59@1022.85,916.275 ; v5@1070.225,910.15 1084.15,910.15 1086.133,908.167 ?.3@1099.831,908.167 ?.38@1105.831,908.167 ?.38@1106.35,908.167
BUFMODE0: ?.5@1050.825,884.85 ?.18@1051.087,870.898 ?.19@1051.475,878.5 ?.26@1046.525,904.275 | length 30.7
  Bottom Layer, Bottom w0.4: ?.26@1046.525,904.275 1048.975,904.275 1050.825,902.425 ?.5@1050.825,884.85 ; ?.18@1051.087,870.573 ?.18@1051.087,870.898 1051.087,875.337 1051.475,875.725 ?.19@1051.475,878.5
BUFMODE1: ?.4@1050.175,884.85 ?.17@1050.087,870.898 ?.20@1050.825,878.5 ?.25@1046.525,903.275 | length 29.3
  Bottom Layer, Bottom w0.4: ?.25@1046.525,903.275 1048.475,903.275 1050.175,901.575 ?.4@1050.175,884.85 ; ?.17@1050.087,870.573 ?.17@1050.087,870.898 1050.087,875.312 1050.825,876.05 ?.20@1050.825,878.5
CLKM: 1.82 31.1 31.2 ?.9@1055.175,945.075 ?.15@1054.525,951.425 ?.37@1046.525,915.275 | length 47.2
  Bottom Layer, Bottom w0.4: ?.37@1046.525,915.275 1052.65,915.275 1058.675,921.3 31.1@1058.675,934.575 ; 1.82@1052.087,959.515 1052.087,956.663 1054.525,954.225 ?.15@1054.525,951.425 ; ?.9@1055.175,945.075 1055.175,942 1058.625,938.55 31.2@1058.625,936.275
CLKP: 1.81 32.1 32.2 ?.8@1055.825,945.075 ?.16@1055.175,951.425 ?.36@1046.525,914.275 | length 51
  Bottom Layer, Bottom w0.4: ?.36@1046.525,914.275 1055.4,914.275 1060.567,919.442 32.1@1060.567,934.525 ; 1.81@1053.087,959.515 1053.087,957.088 1055.175,955 ?.16@1055.175,951.425 ; ?.8@1055.825,945.075 1055.825,942.975 1060.55,938.25 32.2@1060.55,936.225
CMS00: 1.100 14.1 14.2 ?.10@1032.875,945.025 ?.14@1032.225,951.375 ?.55 | length 36.2
  Bottom Layer, Bottom w0.4: 14.1@1023.65,934.475 1023.65,931.925 1028.175,927.4 ?.55@1028.175,922.6 ; 14.2@1023.65,936.175 1028.3,940.825 1029.7,940.825 1032.875,944 ?.10@1032.875,945.025 ; ?.14@1032.225,951.375 1032.225,955.025 1034.087,956.887 1.100@1034.087,959.515
CMS01: 1.99 15.1 15.2 ?.9@1033.525,945.025 ?.15@1032.875,951.375 ?.54 | length 33.7
  Bottom Layer, Bottom w0.4: 15.1@1025.925,934.45 1025.925,932.7 1029.175,929.45 ?.54@1029.175,922.6 ; 15.2@1025.925,936.175 1026.15,936.175 1033.525,943.55 ?.9@1033.525,945.025 ; ?.15@1032.875,951.375 1032.875,954.725 1035.087,956.937 1.99@1035.087,958.8
CMS02: 1.98 16.1 16.2 ?.8@1034.175,945.025 ?.16@1033.525,951.375 ?.53 | length 32.8
  Bottom Layer, Bottom w0.4: 16.1@1028.075,934.425 1028.075,933.35 1030.175,931.25 ?.53@1030.175,922.6 ; 16.2@1028.2,936.175 1028.2,937.1 1034.175,943.075 ?.8@1034.175,945.025 ; ?.16@1033.525,951.375 1033.525,954.288 1036.087,956.85 1.98@1036.087,959.125
CMS03: 1.97 17.1 17.2 ?.7@1034.825,945.025 ?.17@1034.175,951.375 ?.52 | length 32.3
  Bottom Layer, Bottom w0.4: 17.1@1030.25,934.45 1030.25,933.475 1031.175,932.55 ?.52@1031.175,922.6 ; 17.2@1030.25,936.175 1030.25,937.45 1034.825,942.025 ?.7@1034.825,945.025 ; ?.17@1034.175,951.375 1034.175,953.875 1037.087,956.787 1.97@1037.087,959.515
CMS04: 1.96 18.1 18.2 ?.6@1035.475,945.025 ?.18@1034.825,951.375 ?.51 | length 31.6
  Bottom Layer, Bottom w0.4: 18.1@1032.125,934.45 1032.175,934.4 ?.51@1032.175,922.6 ; 18.2@1032.125,936.175 1032.125,938.325 1035.475,941.675 ?.6@1035.475,945.025 ; ?.18@1034.825,951.375 1034.825,953.4 1038.087,956.662 1.96@1038.087,959.515
CMS05: 1.95 19.1 19.2 ?.5@1036.125,945.025 ?.19@1035.475,951.375 ?.50 | length 31
  Bottom Layer, Bottom w0.4: ?.50@1033.175,922.6 1033.175,929.625 1033.95,930.4 1033.95,933.925 ; 19.2@1034,936.175 1034,938.15 1036.125,940.275 ?.5@1036.125,945.025 ; ?.19@1035.475,951.375 1035.475,953.075 1039.087,956.687 1.95@1039.087,959.515
CMS06: 1.94 20.1 20.2 ?.4@1036.775,945.025 ?.20@1036.125,951.375 ?.49 | length 31
  Bottom Layer, Bottom w0.4: ?.49@1034.175,922.6 1034.175,928.825 1035.975,930.625 20.1@1035.975,933.925 ; 20.2@1035.95,936.175 1035.95,937.825 1036.775,938.65 ?.4@1036.775,945.025 ; ?.20@1036.125,951.375 1036.125,952.65 1040.087,956.612 1.94@1040.087,959.515
CMS07: 1.93 21.1 21.2 ?.3@1037.425,945.025 ?.21@1036.775,951.375 ?.48 | length 32.1
  Bottom Layer, Bottom w0.4: ?.48@1035.175,922.6 1035.175,926.975 1037.95,929.75 21.1@1037.95,934.575 ; ?.21@1036.775,951.375 1036.775,952.35 1041.087,956.662 1.93@1041.087,959.515 ; ?.3@1037.425,945.025 1037.425,942.95 1037.875,942.5 21.2@1037.875,936.125
CMS08: 1.90 23.1 23.2 ?.9@1045.075,945 ?.15@1044.425,951.35 ?.45 | length 31.9
  Bottom Layer, Bottom w0.4: ?.45@1038.175,922.6 1038.175,926.95 1041.987,930.763 1042.175,930.95 23.1@1042.175,934.475 ; 23.2@1042.175,936.175 1042.175,937.925 1045.075,940.825 ?.9@1045.075,945 ; 1.90@1044.087,959.515 1044.087,956.113 1044.425,955.775 ?.15@1044.425,951.35
CMS09: 1.89 24.1 24.2 ?.8@1045.725,945 ?.16@1045.075,951.35 ?.44@1039.175,922.6 | length 31.6
  Bottom Layer, Bottom w0.4: ?.44@1039.175,922.6 1039.175,926.225 1044.225,931.275 1044.225,934.475 24.1@1044.15,934.55 ; 24.2@1044.15,936.25 1044.15,937.925 1045.7,939.475 ?.8@1045.7,945 ; ?.16@1045.075,951.35 1045.075,959.503 1.89@1045.087,959.515
CMS10: 1.88 25.1 25.2 ?.7@1046.375,945 ?.17@1045.725,951.35 ?.43@1040.175,922.6 | length 31.6
  Bottom Layer, Bottom w0.4: ?.43@1040.175,922.6 1040.175,925.775 1046.175,931.775 1046.175,934.4 25.1@1046.35,934.575 ; ?.17@1045.725,951.35 1045.725,956.4 1046.087,956.762 1.88@1046.087,959.515 ; 25.2@1046.2,936.275 1046.375,936.45 ?.7@1046.375,945
CMS11: 1.87 26.1 26.2 ?.6@1047.025,945 ?.18@1046.375,951.35 ?.42@1041.175,922.6 | length 32.7
  Bottom Layer, Bottom w0.4: ?.42@1041.175,922.6 1041.175,925.475 1048.425,932.725 26.1@1048.425,934.55 ; ?.18@1046.375,951.35 1046.375,955.175 1047.087,955.887 1.87@1047.087,959.515 ; ?.6@1047.025,945 1047.025,940.075 1048.425,938.675 26.2@1048.425,936.25
CMS12: 1.86 27.1 27.2 ?.5@1047.675,945 ?.19@1047.025,951.35 ?.41@1042.175,922.6 | length 34
  Bottom Layer, Bottom w0.4: ?.41@1042.175,922.6 1042.175,924.225 1050.725,932.775 27.1@1050.725,934.55 ; ?.19@1047.025,951.35 1047.025,954.225 1048.087,955.287 1.86@1048.087,959.515 ; ?.5@1047.7,944.855 1047.7,941.3 1050.725,938.275 27.2@1050.725,936.25
CMS13: 1.85 28.1 28.2 ?.4@1048.325,945 ?.20@1047.675,951.35 ?.40@1046.525,918.275 | length 38.9
  Bottom Layer, Bottom w0.4: ?.40@1046.525,918.275 1047.85,918.275 1052.65,923.075 28.1@1052.65,934.575 ; ?.20@1047.675,951.35 1047.675,953.225 1049.087,954.637 1.85@1049.087,959.515 ; ?.4@1048.325,945 1048.325,942.3 1052.6,938.025 28.2@1052.6,936.275
CMS14: 1.84 29.1 29.2 ?.3@1048.975,945 ?.21@1048.325,951.35 ?.39@1046.525,917.275 | length 42
  Bottom Layer, Bottom w0.4: ?.39@1046.525,917.275 1049.475,917.275 1054.6,922.4 29.1@1054.6,934.275 ; ?.21@1048.325,951.35 1048.325,952.6 1050.087,954.362 1.84@1050.087,959.515 ; ?.3@1048.975,945 1048.975,943.075 1054.6,937.45 29.2@1054.6,936.275
CMS15: 1.83 30.1 30.2 ?.10@1054.525,945.075 ?.14@1053.875,951.425 ?.38@1046.525,916.275 | length 44.2
  Bottom Layer, Bottom w0.4: ?.38@1046.525,916.275 1051.2,916.275 1056.6,921.675 30.1@1056.6,934.65 ; 1.83@1051.087,959.515 1051.087,956.238 1053.875,953.45 ?.14@1053.875,951.425 ; ?.10@1054.525,945.075 1054.525,940.825 1056.65,938.7 30.2@1056.65,936.275
CMSCLK: 1.91 22.1 22.2 ?.10@1044.425,945 ?.14@1043.775,951.35 ?.47 | length 32.6
  Bottom Layer, Bottom w0.4: ?.47@1036.175,922.6 1036.175,926.575 1040.225,930.625 22.1@1040.225,934.45 ; 22.2@1040.225,936.15 1040.225,938.6 1044.4,942.775 ?.10@1044.4,945 ; 1.91@1043.087,959.515 1043.087,954.763 1043.775,954.075 ?.14@1043.775,951.35
CODE_IB: ?.9@1053.425,884.85 ?.15@1054.075,878.5 ?.22@1055.087,870.898 ?.30@1046.525,908.275 | length 38.1
  Bottom Layer, Bottom w0.4: ?.30@1046.525,908.275 1050.35,908.275 1054.925,903.7 1054.925,893.85 1053.425,892.35 ?.9@1053.425,884.85 ; ?.15@1054.075,878.5 1054.075,875.475 1055.087,874.463 ?.22@1055.087,870.898 ?.22@1055.087,870.573
DAC+10V: 49.2 50.2 ?.5@1127.9,971.005 ?.27@1105.831,919.167 _1.5 | length 111.8
  Top Layer, Top w0.5: v2(1073.075,877.15) 1073.025,877.2 1073.025,879.444 1073.075,879.494 v7(1073.075,887.675) ; v7@1073.1,897.95 1094.317,919.167 v7(1102.517,919.167) ; v7@1084.05,864.825 1085.65,863.225 1085.65,859.825 v2(1084.075,858.25)
  Bottom Layer, Bottom w0.5: v2(1073.075,877.15) 1073.075,875.8 v7(1084.025,864.85) ; v7(1073.075,887.675) v7(1073.075,897.975) ; v7(1102.517,919.167) ?.27@1105.831,919.167 ; v3(1114.475,950.6) 1114.475,950.2 1117.075,947.6 1117.075,942.9 1118.78,941.195 _1.5@1119.95,941.195 ; ?.5@1127.9,971.005 1129.07,971.005 1130.775,969.3 1130.775,964.6 1133.375,962 v3(1133.375,961.6)
DAC_-10V: ?.3@1122.45,969.735 ?.28@1105.831,918.167 _1.3 | length 106.2
  Top Layer, Top w0.5: v2(1070.075,858.25) v7@1083.425,871.6
  Bottom Layer, Bottom w0.5: v7(1083.35,871.525) 1087.075,875.25 v2(1087.075,877.15) 1087.075,892.3 1094.125,899.35 1106.6,899.35 1108.9,901.65 v7(1108.9,917.6) 1108.333,918.167 ?.28@1105.831,918.167 ; v3@1114.575,964.5 1114.72,964.644 1119.81,969.735 ?.3@1122.45,969.735 ; _1.3@1125.4,942.465 1128.04,942.465 v3@1133.275,947.7
  other v3: 1133.375,947.6 1114.475,964.6
DAC_AGND: 26_1.2 26_1_1.2 27_1.2 27_1_1.2 ?.1@1119.55,949.275 ?.1@1126.35,962.85 ?.19@1119.525,947.825 ?.19@1128.325,964.375
  other v1: 1120.725,939.95 1129.9,940.425 1134.45,940.8 1115.125,943.125 1127.8,944.7 1113.05,945.75 1125.375,946.075 1118.775,946.125 1127.725,948.175 1131.65,948.25 1109.3,948.525 1122.725,949.55 1110.025,951.325 1108,961.6 1136.6,961.65 1110.925,962.2 1131.4,962.525 1125.075,962.8 1109.125,963.975 1116.3,964.3 1120.05,964.425 1128.5,966.1 1132.025,967 1113.975,967.1 1132.275,969.125 1107.725,969.475 1110.675,969.5 1135.475,969.975 1132.625,971.075 1110,971.7 1114.675,972.275 1119.875,972.375
  other v3: 1135.275,950.7 1112.575,961.5
DAC_CLR: ?.7@1122.425,961.125 ?.7@1125.425,951.075 ?.77 ?.90 | length 108.1
  Top Layer, Top w0.3: v1(1049.45,860.775) 1069.7,860.775 1081.975,873.05 v2(1081.975,879.05) ; v3@1112.675,959.6 1118.775,959.6 1120.3,961.125 ?.7@1122.425,961.125 ; ?.7@1125.425,951.075 1127.55,951.075 1129.075,952.6 v3@1135.175,952.6
  Bottom Layer, Bottom w0.3: ?.90@1044.087,864.573 1044.087,862.463 1045.775,860.775 v1(1049.45,860.775) ; ?.77@1057.087,864.573 1057.087,853.488 1060.6,849.975 1072.625,849.975 1075.175,852.525 v2(1075.175,856.35)
  other v3: 1135.275,952.7 1112.575,959.5
DAC_DGND: 37.1 37_1.1 38.1 38_1.1 ?.1@1119.3,951 ?.1@1126.25,960.8 ?.15@1119.525,950.425 ?.15@1128.325,961.775 | length 5
  Top Layer, Top w0.4: 1118.025,950.525 1118.05,950.5 1119.45,950.5 ?.15@1119.525,950.425 1119.6,950.5 1120.37,950.5 1120.575,950.705 ; 1127.275,961.375 1127.275,961.495 1127.48,961.7 1128.25,961.7 ?.15@1128.325,961.775 1129.095,961.775 1129.265,961.605
  other v1: 1130.6,950.875 1121.55,951.1 1115.825,951.55 1123.225,951.8 1121.95,952.625 1136.825,953.475 1110.325,954.275 1119.55,954.3 1136.85,955.575 1107.975,955.85 1121.25,956.125 1126.425,956.35 1116.05,956.6 1125.375,957.325 1136.7,957.7 1109.55,957.8 1129.025,957.9 1125.4,959.25 1107.65,959.775 1124.525,961 1116.95,961.375
  other v3: 1133.375,955.6
DAC_LDAC: ?.8@1122.425,960.475 ?.8@1125.425,951.725 ?.78 ?.89 | length 104.6
  Top Layer, Top w0.3: v1(1048.2,861.7) 1068.575,861.7 1081.075,874.2 v2(1081.075,877.15) ; v3(1114.475,958.6) 1118.875,958.6 1120.75,960.475 ?.8@1122.425,960.475 ; ?.8@1125.425,951.725 1127.1,951.725 1128.975,953.6 v3(1133.375,953.6)
  Bottom Layer, Bottom w0.3: ?.89@1045.087,864.573 1045.087,862.713 1046.1,861.7 v1(1048.2,861.7) ; ?.78@1056.087,864.573 1056.087,853.063 1059.95,849.2 1073.6,849.2 ; 1073.625,849.2 1073.6,849.2 ; v2(1076.075,858.25) 1076.075,851.675 1073.6,849.2
DAC_RESET: ?.6@1122.425,961.775 ?.6@1125.425,950.425 ?.76 ?.91 | length 104.4
  Top Layer, Top w0.3: v1@1048.2,859.675 v1(1048.275,859.675) 1069.825,859.675 1083.075,872.925 v2(1083.075,877.15) ; v3(1114.475,960.6) 1118.675,960.6 1119.85,961.775 ?.6@1122.425,961.775 ; ?.6@1125.425,950.425 1128,950.425 1129.175,951.6 v3(1133.375,951.6)
  Bottom Layer, Bottom w0.3: ?.91@1043.087,864.573 1043.087,862.088 1045.5,859.675 v1(1048.275,859.675) ; ?.76@1058.087,864.573 1058.087,853.688 1060.825,850.95 1072.25,850.95 ; 1072.275,850.95 1072.25,850.95 ; v2(1074.075,858.25) 1074.075,852.775 1072.25,850.95